# EAGLE board PCB v55 (EAGLE 9.7.0)
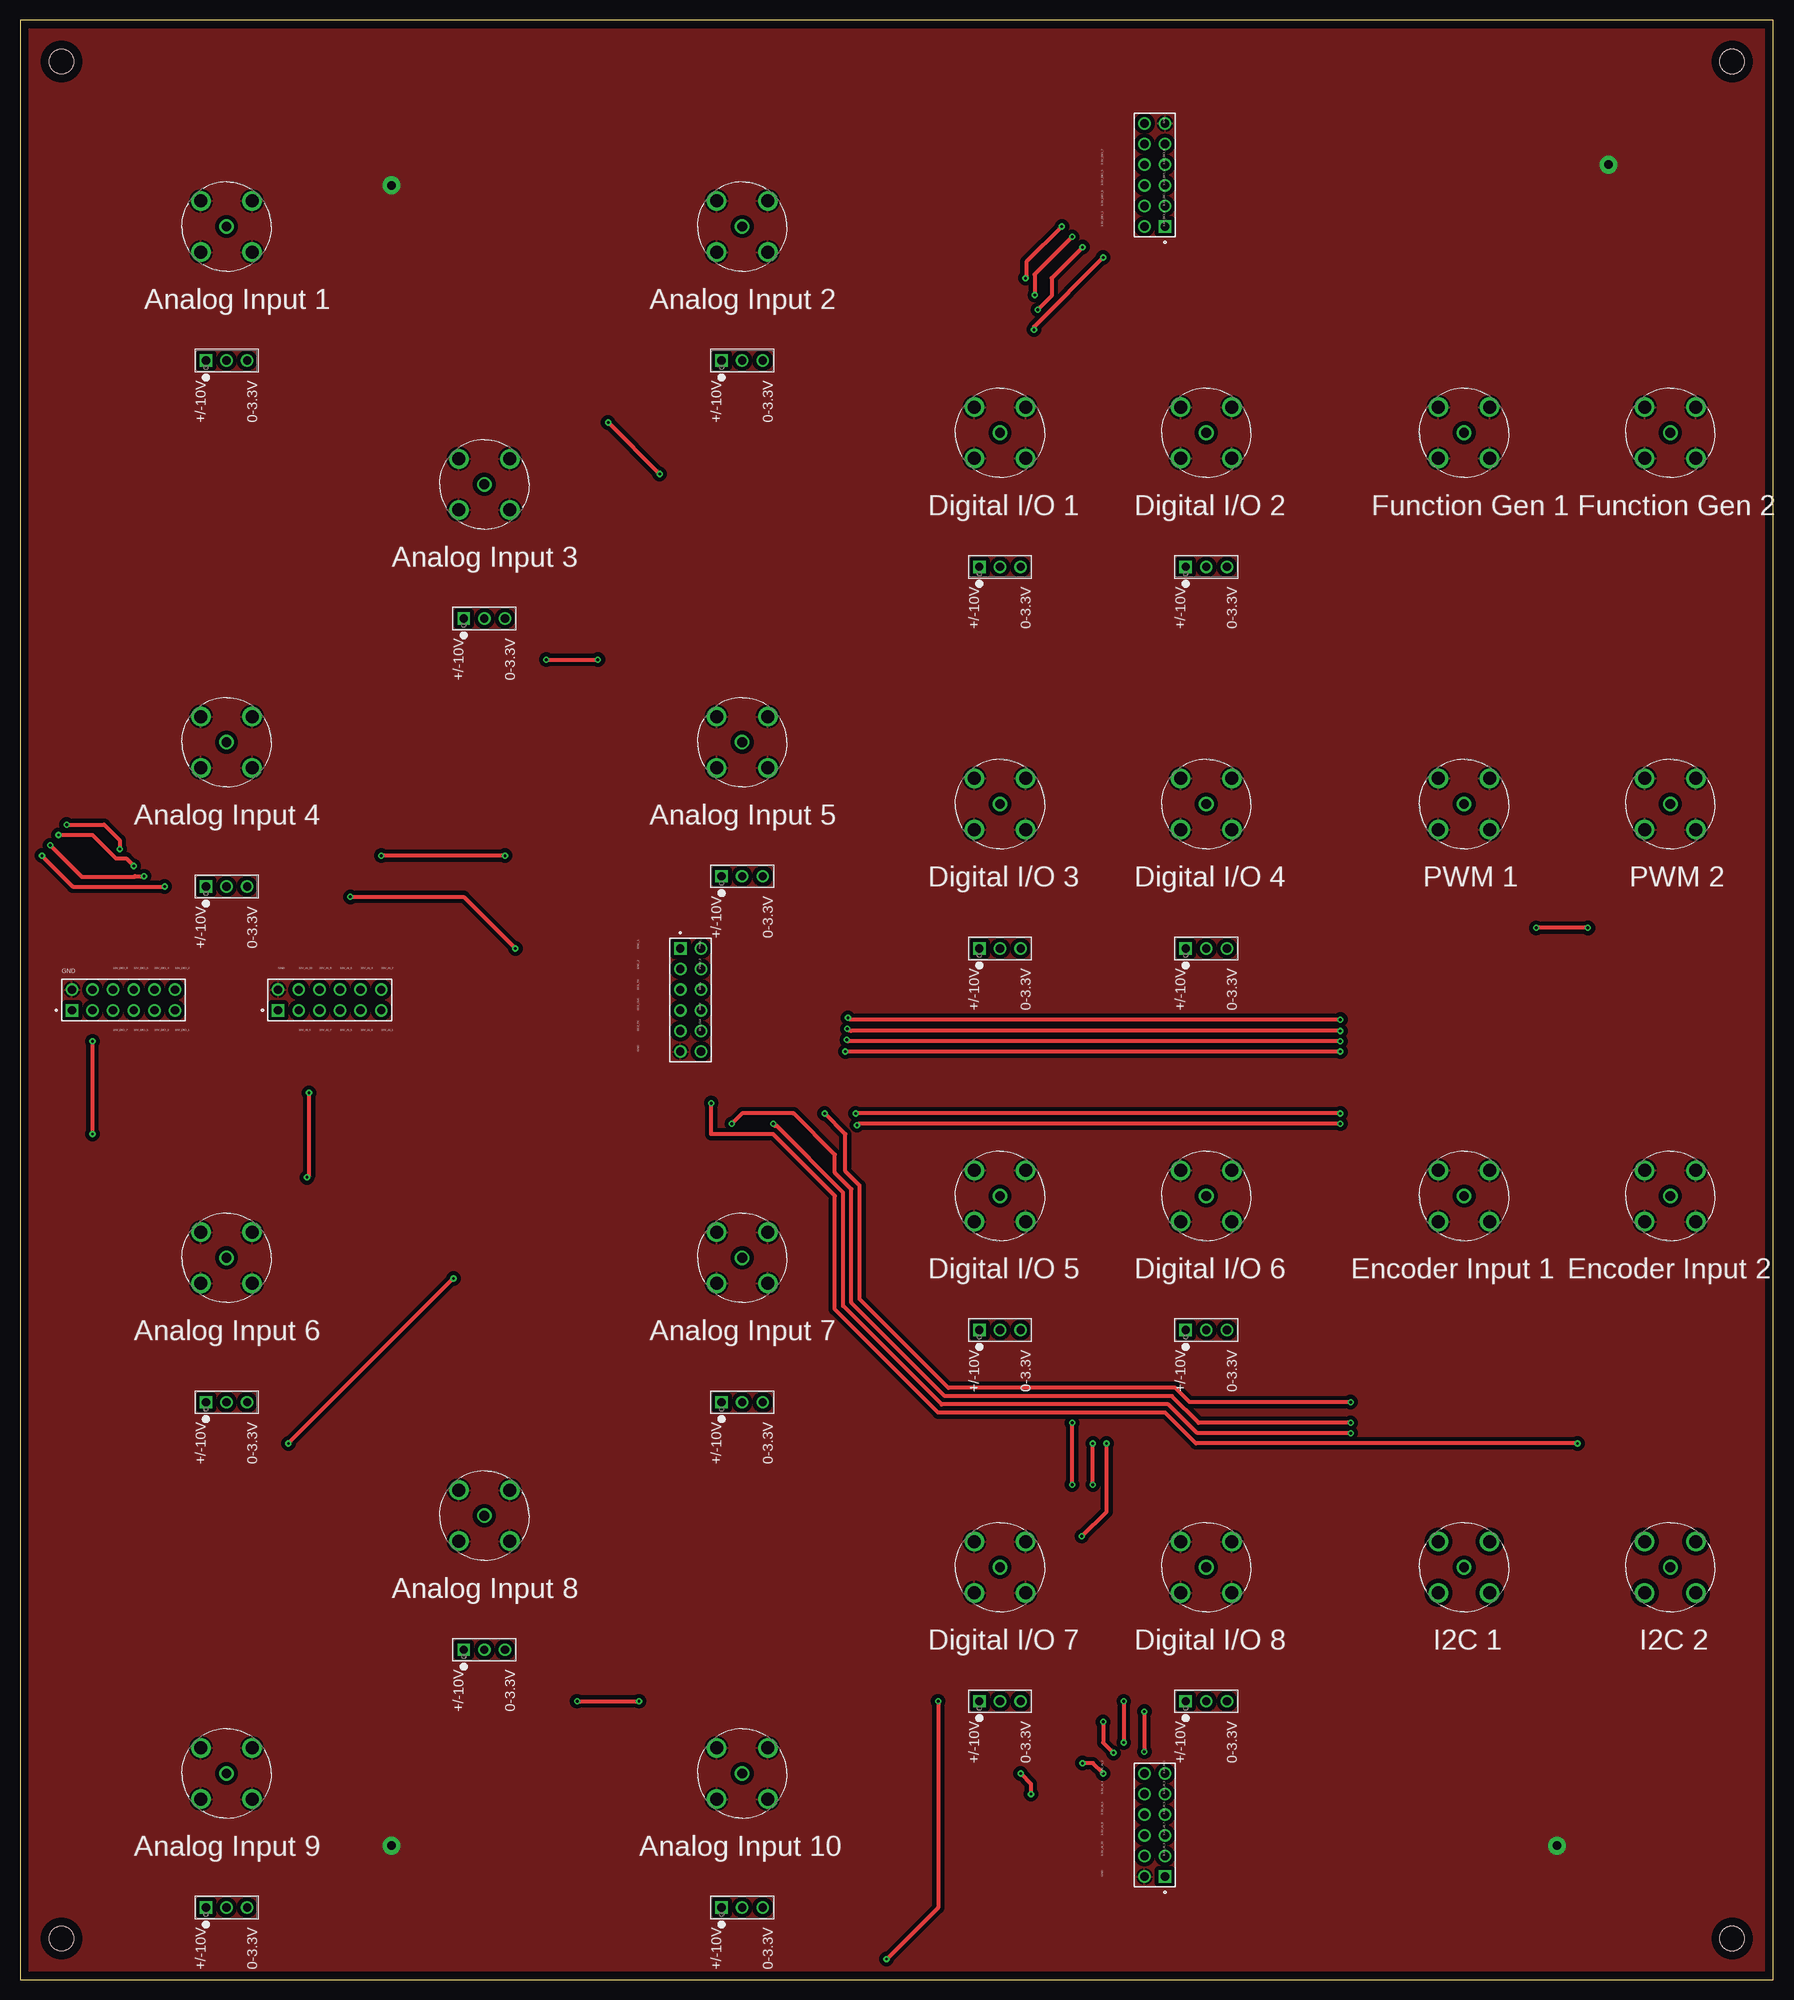
[diagram p0: board, top side]
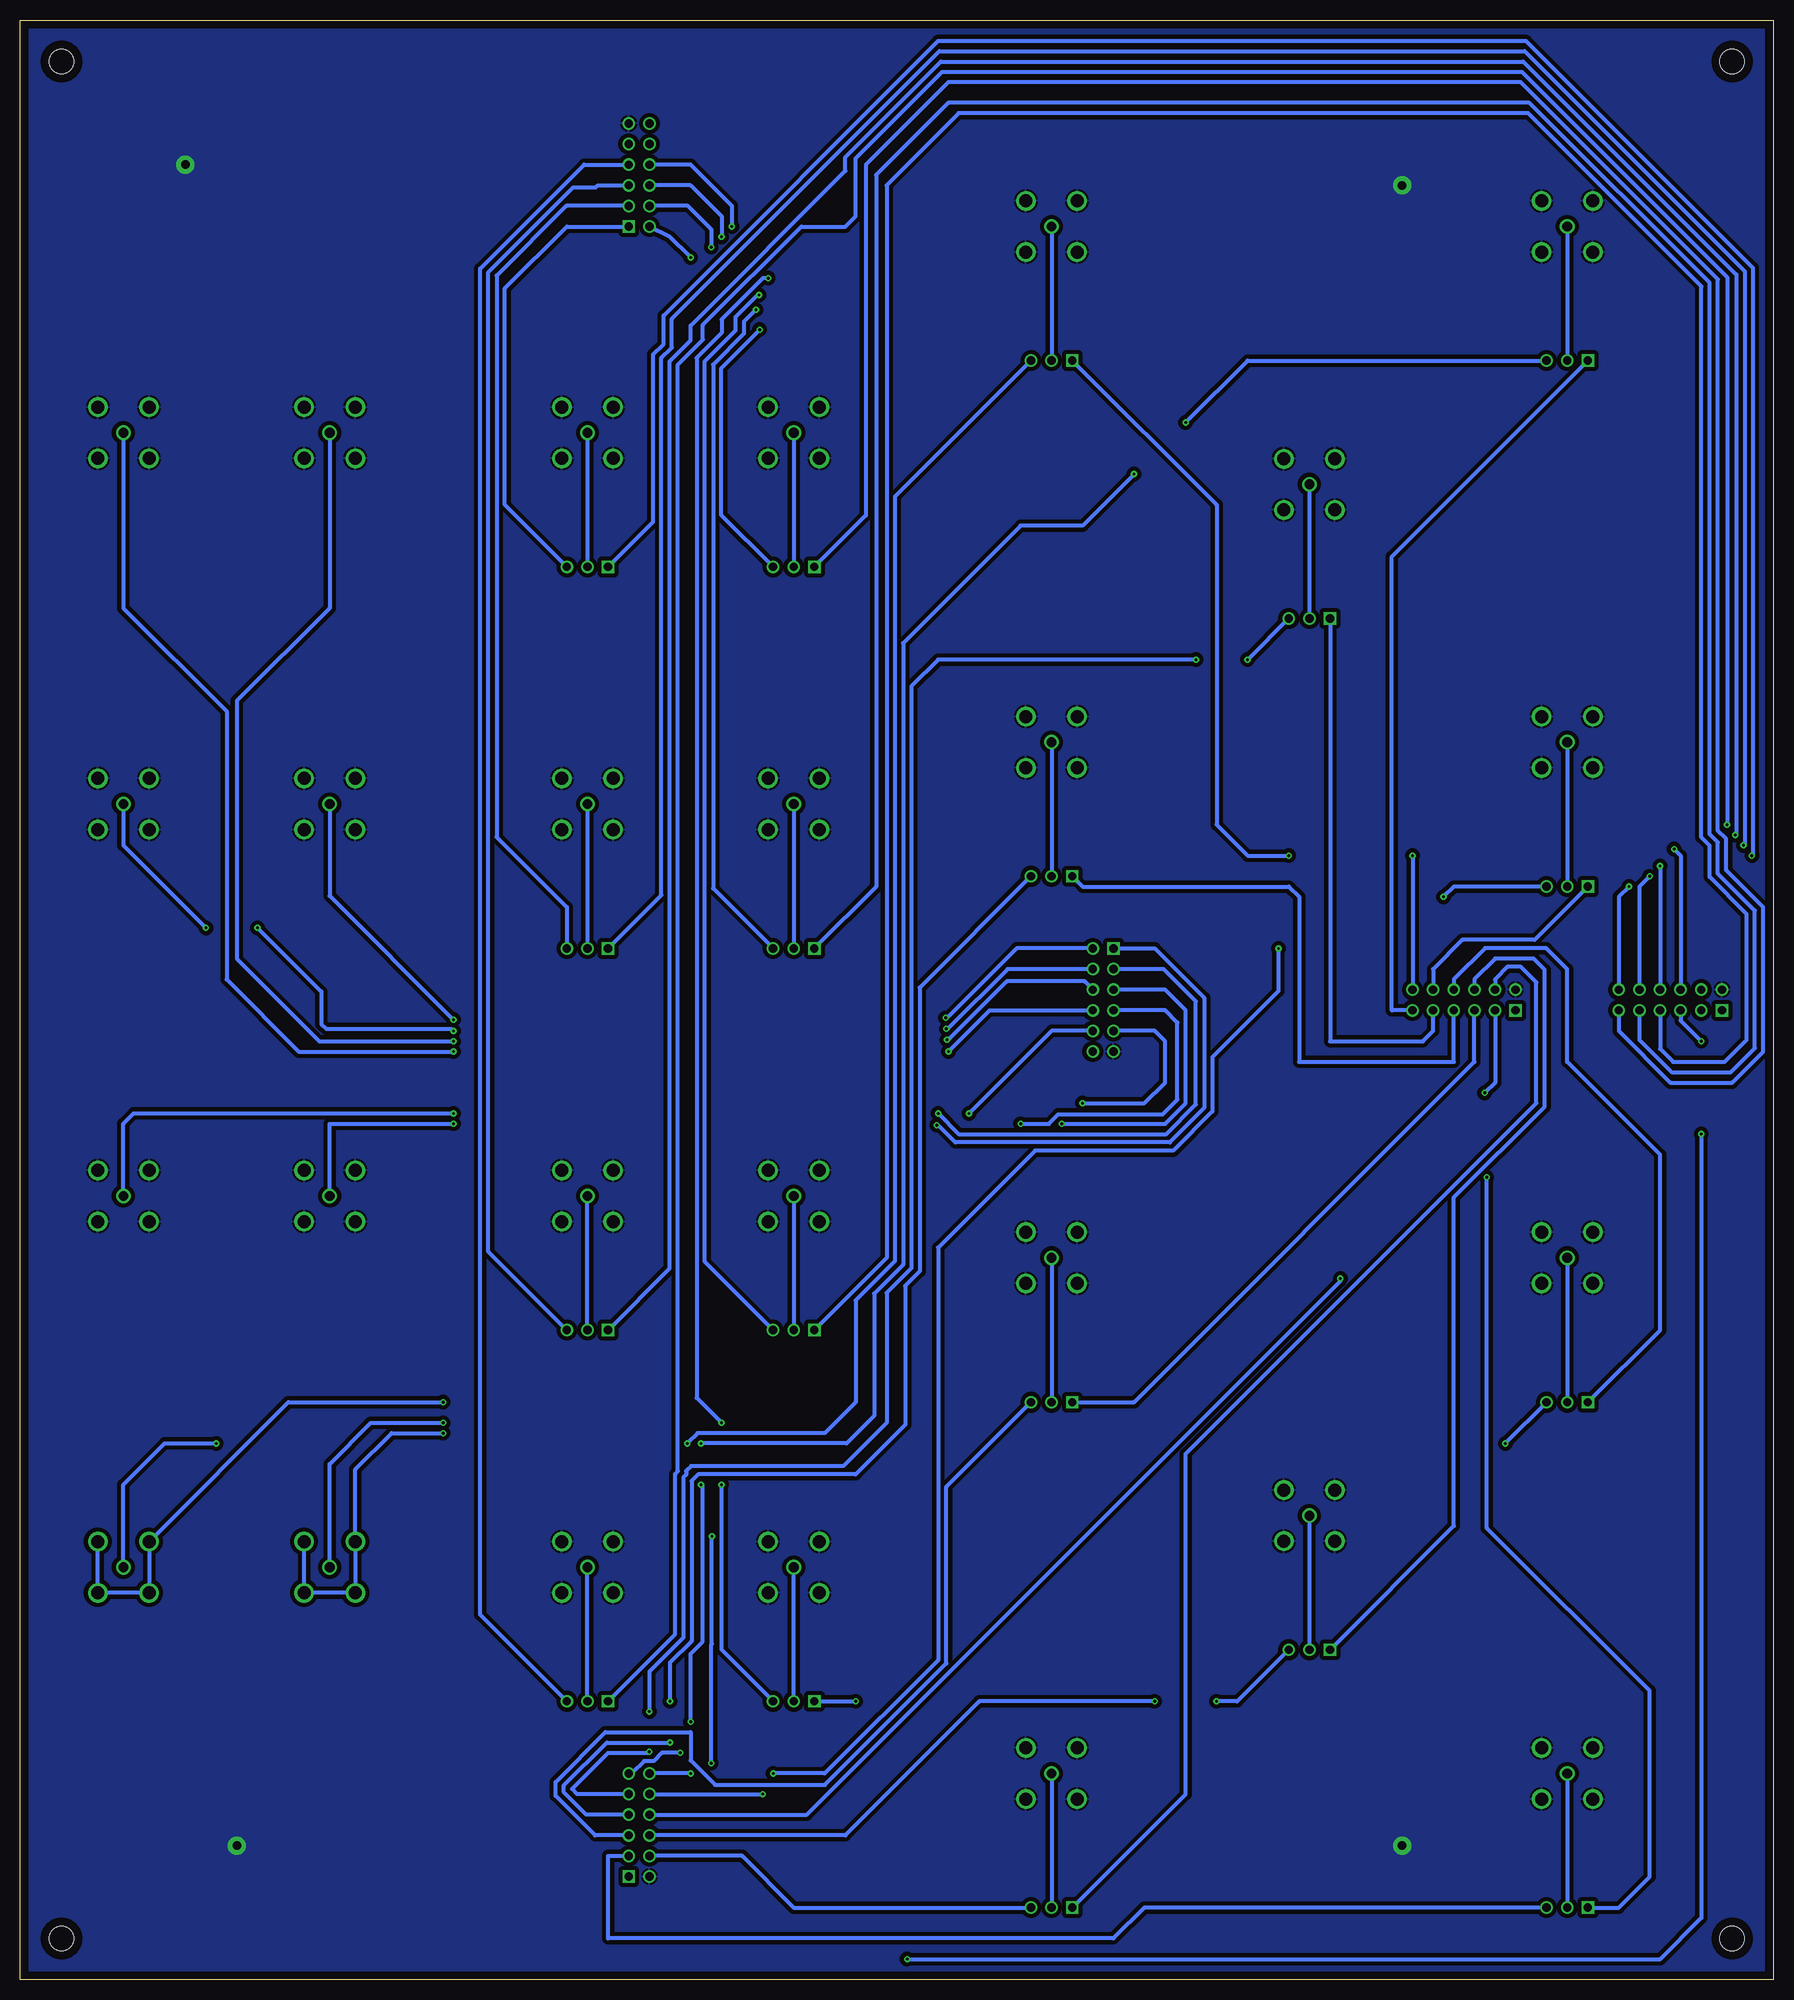
[diagram p1: board, bottom side, seen from below]

Size 215.9 x 241.3 mm. Coordinates in mm from the lower left corner, seen from the top.
Outline: 0,0 215.9,0 215.9,241.3 0,241.3 0,0
Copper layers (1*16): Top 0.035mm / dielectric 1.5mm / Bottom 0.035mm
Design rules "Fusion Electronics Design Rules": minimum track width 6mil, minimum drill 0.35mm, track to track 20mil, track to pad 20mil, pad to pad 20mil, via to via 20mil, smd to smd 20mil, copper to edge 40mil, drill to drill 20mil, minimum pad ring 10mil, minimum via ring 8mil, stop-mask expansion 4mil, vias tented up to drill 9999mil, thermal gap 10mil
Holes 3.05 mm at 5.08,236.22 5.08,5.08 210.82,5.08 210.82,236.22

## Footprints (pad centres in the part's own frame; a part is rotated, then mirrored left to right if it is on the bottom)
SAMTEC_DW-06-12-L-D-650 = drill 1.02 pad 1.37 square: 01 0,0 | drill 1.02 pad 1.37: 02 0,2.54; 03 2.54,0; 04 2.54,2.54; 05 5.08,0; 06 5.08,2.54; 07 7.62,0; 08 7.62,2.54; 09 10.16,0; 10 10.16,2.54; 11 12.7,0; 12 12.7,2.54
LINX_CONBNC001 = drill 1.2: 1 0,0 | drill 1.6: S1 3.15,3.15; S2 3.15,-3.15; S3 -3.15,-3.15; S4 -3.15,3.15
CONN_PH1-03-UA_ADM = drill 1.016 pad 1.524 square: 1 0,0 | drill 1.016 pad 1.524: 2 2.54,0; 3 5.08,0

## Placement (x,y rotation side)
J1  DW-06-12-L-D-650  [SAMTEC_DW-06-12-L-D-650]  6.35,119.38 0 top
J2  CONBNC001  [LINX_CONBNC001]  203.2,96.52 0 top
J3  CONBNC001  [LINX_CONBNC001]  203.2,144.78 0 top
J4  CONBNC001  [LINX_CONBNC001]  203.2,190.5 0 top
J5  CONBNC001  [LINX_CONBNC001]  25.4,152.4 0 top
J6  CONBNC001  [LINX_CONBNC001]  57.15,184.15 0 top
J7  CONBNC001  [LINX_CONBNC001]  25.4,215.9 0 top
J8  CONBNC001  [LINX_CONBNC001]  203.2,50.8 0 top
J9  CONBNC001  [LINX_CONBNC001]  25.4,25.4 0 top
J10  CONBNC001  [LINX_CONBNC001]  25.4,88.9 0 top
J11  CONBNC001  [LINX_CONBNC001]  88.9,215.9 0 top
J12  CONBNC001  [LINX_CONBNC001]  57.15,57.15 0 top
J13  CONBNC001  [LINX_CONBNC001]  88.9,25.4 0 top
J14  CONBNC001  [LINX_CONBNC001]  88.9,88.9 0 top
J15  CONBNC001  [LINX_CONBNC001]  88.9,152.4 0 top
J16  CONBNC001  [LINX_CONBNC001]  120.65,50.8 0 top
J17  CONBNC001  [LINX_CONBNC001]  120.65,96.52 0 top
J18  CONBNC001  [LINX_CONBNC001]  120.65,144.78 0 top
J19  CONBNC001  [LINX_CONBNC001]  120.65,190.5 0 top
J20  CONBNC001  [LINX_CONBNC001]  146.05,190.5 0 top
J21  CONBNC001  [LINX_CONBNC001]  146.05,144.78 0 top
J22  CONBNC001  [LINX_CONBNC001]  146.05,96.52 0 top
J23  CONBNC001  [LINX_CONBNC001]  146.05,50.8 0 top
J24  CONBNC001  [LINX_CONBNC001]  177.8,190.5 0 top
J25  CONBNC001  [LINX_CONBNC001]  177.8,144.78 0 top
J26  CONBNC001  [LINX_CONBNC001]  177.8,96.52 0 top
J27  CONBNC001  [LINX_CONBNC001]  177.8,50.8 0 top
J28  DW-06-12-L-D-650  [SAMTEC_DW-06-12-L-D-650]  31.75,119.38 0 top
J29  DW-06-12-L-D-650  [SAMTEC_DW-06-12-L-D-650]  81.28,127 270 top
J30  DW-06-12-L-D-650  [SAMTEC_DW-06-12-L-D-650]  140.97,215.9 90 top
J31  DW-06-12-L-D-650  [SAMTEC_DW-06-12-L-D-650]  140.97,12.7 90 top
J32  PH1-03-UA  [CONN_PH1-03-UA_ADM]  22.86,199.39 0 top
J33  PH1-03-UA  [CONN_PH1-03-UA_ADM]  54.61,167.64 0 top
J34  PH1-03-UA  [CONN_PH1-03-UA_ADM]  86.36,199.39 0 top
J35  PH1-03-UA  [CONN_PH1-03-UA_ADM]  22.86,134.62 0 top
J36  PH1-03-UA  [CONN_PH1-03-UA_ADM]  86.36,135.89 0 top
J37  PH1-03-UA  [CONN_PH1-03-UA_ADM]  22.86,71.12 0 top
J38  PH1-03-UA  [CONN_PH1-03-UA_ADM]  54.61,40.64 0 top
J39  PH1-03-UA  [CONN_PH1-03-UA_ADM]  22.86,8.89 0 top
J40  PH1-03-UA  [CONN_PH1-03-UA_ADM]  86.36,8.89 0 top
J41  PH1-03-UA  [CONN_PH1-03-UA_ADM]  118.11,173.99 0 top
J42  PH1-03-UA  [CONN_PH1-03-UA_ADM]  143.51,173.99 0 top
J45  PH1-03-UA  [CONN_PH1-03-UA_ADM]  118.11,127 0 top
J46  PH1-03-UA  [CONN_PH1-03-UA_ADM]  143.51,127 0 top
J49  PH1-03-UA  [CONN_PH1-03-UA_ADM]  118.11,80.01 0 top
J50  PH1-03-UA  [CONN_PH1-03-UA_ADM]  143.51,80.01 0 top
J53  PH1-03-UA  [CONN_PH1-03-UA_ADM]  118.11,34.29 0 top
J54  PH1-03-UA  [CONN_PH1-03-UA_ADM]  143.51,34.29 0 top
J56  PH1-03-UA  [CONN_PH1-03-UA_ADM]  86.36,71.12 0 top

## Library data of the parts
J1 J28-J31 = DW-06-12-L-D-650; MANUFACTURER: Samtec; PARTREV: R; STANDARD: Manufacturer Recommendations
J2-J27 = CONBNC001; AVAILABILITY: In Stock; CHECK_PRICES: https://www.snapeda.com/parts/CONBNC001/Linx/view-part/?ref=eda; DESCRIPTION: BNC Jack 50 Ohm PCB Through Hole; MF: Linx Technologies Inc.; MP: CONBNC001; PACKAGE: None; PRICE: None; PURCHASE-URL: https://www.snapeda.com/api/url_track_click_mouser/?unipart_id=12122496&manufacturer=Linx Technologies Inc.&part_name=CONBNC001&search_term=None; SNAPEDA_LINK: https://www.snapeda.com/parts/CONBNC001/Linx/view-part/?ref=snap
J32-J42 J45 J46 J49 J50 J53 J54 J56 = Pin Headers; COPYRIGHT: Copyright (C) 2025 Ultra Librarian. All rights reserved.; DIGIKEY_PART_NUMBER_1: 2057-PH1-03-UA-ND; MANUFACTURER_PART_NUMBER: PH1-03-UA; MFR_NAME: ADAM TECHNOLOGIES INC

## Nets
3.3V_AI_1: J31.11 J32.3
3.3V_AI_2: J31.12 J34.3
3.3V_AI_3: J31.09 J33.3
3.3V_AI_4: J31.10 J35.3
3.3V_AI_5: J31.07 J36.3
3.3V_AI_6: J31.08 J37.3
3.3V_AI_7: J31.05 J56.3
3.3V_AI_8: J31.06 J38.3
3.3V_AI_9: J31.03 J39.3
3.3V_AI_10: J31.04 J40.3
3.3V_DIO_1: J30.02 J41.3
3.3V_DIO_2: J30.01 J42.3
3.3V_DIO_3: J30.04 J45.3
3.3V_DIO_4: J30.03 J46.3
3.3V_DIO_5: J30.06 J49.3
3.3V_DIO_6: J30.05 J50.3
3.3V_DIO_7: J30.08 J53.3
3.3V_DIO_8: J30.07 J54.3
10V_AI_1: J28.11 J32.1
10V_AI_2: J28.12 J34.1
10V_AI_3: J28.09 J33.1
10V_AI_4: J28.10 J35.1
10V_AI_5: J28.07 J36.1
10V_AI_6: J28.08 J37.1
10V_AI_7: J28.05 J56.1
10V_AI_8: J28.06 J38.1
10V_AI_9: J28.03 J39.1
10V_AI_10: J28.04 J40.1
10V_DIO_1: J1.11 J41.1
10V_DIO_2: J1.12 J42.1
10V_DIO_3: J1.09 J45.1
10V_DIO_4: J1.10 J46.1
10V_DIO_5: J1.07 J49.1
10V_DIO_6: J1.08 J50.1
10V_DIO_7: J1.05 J53.1
10V_DIO_8: J1.06 J54.1
AI1: J7.1 J32.2
AI2: J11.1 J34.2
AI3: J6.1 J33.2
AI4: J5.1 J35.2
AI5: J15.1 J36.2
AI6: J10.1 J37.2
AI7: J14.1 J56.2
AI8: J12.1 J38.2
AI9: J9.1 J39.2
AI10: J13.1 J40.2
DAC1: J24.1 J29.06
DAC2: J4.1 J29.08
DIO1: J19.1 J41.2
DIO2: J20.1 J42.2
DIO3: J18.1 J45.2
DIO4: J21.1 J46.2
DIO5: J17.1 J49.2
DIO6: J22.1 J50.2
DIO7: J16.1 J53.2
DIO8: J23.1 J54.2
ENC1: J26.1 J29.01
ENC2: J2.1 J29.03
GND: J1.02 J2.S1 J2.S2 J2.S3 J2.S4 J3.S1 J3.S2 J3.S3 J3.S4 J4.S1 J4.S2 J4.S3 J4.S4 J5.S1 J5.S2 J5.S3 J5.S4 J6.S1 J6.S2 J6.S3 J6.S4 J7.S1 J7.S2 J7.S3 J7.S4 J9.S1 J9.S2 J9.S3 J9.S4 J10.S1 J10.S2 J10.S3 J10.S4 J11.S1 J11.S2 J11.S3 J11.S4 J12.S1 J12.S2 J12.S3 J12.S4 J13.S1 J13.S2 J13.S3 J13.S4 J14.S1 J14.S2 J14.S3 J14.S4 J15.S1 J15.S2 J15.S3 J15.S4 J16.S1 J16.S2 J16.S3 J16.S4 J17.S1 J17.S2 J17.S3 J17.S4 J18.S1 J18.S2 J18.S3 J18.S4 J19.S1 J19.S2 J19.S3 J19.S4 J20.S1 J20.S2 J20.S3 J20.S4 J21.S1 J21.S2 J21.S3 J21.S4 J22.S1 J22.S2 J22.S3 J22.S4 J23.S1 J23.S2 J23.S3 J23.S4 J24.S1 J24.S2 J24.S3 J24.S4 J25.S1 J25.S2 J25.S3 J25.S4 J26.S1 J26.S2 J26.S3 J26.S4 J28.02 J29.11 J30.11 J31.02
I2C1_CLK: J27.S1 J27.S2 J27.S3 J27.S4 J29.07
I2C1_TX: J27.1 J29.05
I2C2_CLK: J8.S1 J8.S2 J8.S3 J8.S4 J29.10
I2C2_TX: J8.1 J29.09
N$15: J1.04
N$20: J28.01
N$43: J29.12
N$48: J30.09
N$54: J30.10
N$55: J30.12
N$56: J31.01
PWM_1: J25.1 J29.02
PWM_2: J3.1 J29.04

## Tracks (layer width: path | path; a pad name or v marks a point on that pad's centre or on a via)
3.3V_AI_1  (via drill 0.35)
  Top 0.508: v72.39,191.77 v78.74,185.42 | v132.08,60.96 v132.08,66.04 | v133.35,31.75 133.35,29.21 v134.62,27.94
  Bottom 0.508: J32.3 64.77,199.39 v72.39,191.77 | v78.74,185.42 85.09,179.07 92.71,179.07 107.19,164.59 107.19,88.06 110.74,84.5 110.74,69.43 114.13,66.04 v132.08,66.04 | v133.35,31.75 133.35,40.14 131.86,41.63 131.86,60.74 v132.08,60.96 | v134.62,27.94 136.9,27.94 137.92,26.93 139.06,26.93 140.59,25.4 J31.11
3.3V_AI_2  (via drill 0.35)
  Top 0.508: v133.35,25.4 132.08,26.67 v130.81,26.67 | v133.77,66.04 133.77,57.66 v130.72,54.61
  Bottom 0.508: v133.35,25.4 J31.12 | J34.3 108.2,182.63 108.2,88.48 113.03,83.65 113.03,71.12 116.84,67.31 132.5,67.31 v133.77,66.04 | v130.81,26.67 130.81,41.24 130.72,41.34 v130.72,54.61
3.3V_AI_3  (via drill 0.35)
  Top 0.508: v64.77,162.56 v71.12,162.56 | v138.43,33.02 v138.43,28.07
  Bottom 0.508: J33.3 v64.77,162.56 | v71.12,162.56 102.87,162.56 106.17,159.26 106.17,87.64 109.22,84.59 109.22,68.58 114.55,63.25 133.29,63.25 133.89,62.65 133.89,62.2 134.24,61.85 134.24,42.13 138.43,37.93 v138.43,33.02 | J31.09 147.32,22.86 147.96,23.5 143.51,27.94 138.55,27.94 v138.43,28.07
3.3V_AI_4  (via drill 0.35)
  Top 0.508: v40.64,133.35 54.61,133.35 v60.96,127 | v123.19,25.4 124.46,24.13 v124.46,22.86
  Bottom 0.508: J35.3 39.37,134.62 v40.64,133.35 | v60.96,127 60.96,121.75 69.09,113.62 69.09,106.94 73.92,102.11 90.93,102.11 102.87,90.17 102.87,39.37 116.84,25.4 v123.19,25.4 | J31.10 v124.46,22.86
3.3V_AI_5  (via drill 0.35)
  Top 0.508: v135.89,34.29 v135.89,29.21
  Bottom 0.508: J36.3 105.16,122.17 105.16,87.22 106.93,85.44 106.93,68.33 113.03,62.23 132.42,62.23 133.22,61.43 133.22,41.71 135.89,39.04 v135.89,34.29 | v135.89,29.21 143.68,29.21 148.97,23.92 148.97,23.07 146.22,20.32 J31.07
3.3V_AI_6  (via drill 0.35)
  Top 0.508: v33.02,66.04 v53.34,86.36
  Bottom 0.508: J37.3 v33.02,66.04 | J31.08 119.05,20.32 53.34,86.03 v53.34,86.36
3.3V_AI_7
  Bottom 0.508: J56.3 101.85,60.71 101.85,38.95 116.8,24 130.34,24 133.35,27.01 133.35,30.48 143.84,30.48 149.99,24.34 149.99,22.65 145.11,17.78 J31.05
3.3V_AI_8  (via drill 0.35)
  Top 0.508: v68.58,34.29 v76.2,34.29
  Bottom 0.508: J38.3 66.04,34.29 v68.58,34.29 | v76.2,34.29 97.79,34.29 114.3,17.78 J31.06
3.3V_AI_9
  Bottom 0.508: J39.3 77.47,8.89 81.28,5.08 143.51,5.08 143.51,15.24 J31.03
3.3V_AI_10
  Bottom 0.508: J40.3 120.65,8.89 127,15.24 J31.04
3.3V_DIO_1  (via drill 0.35)
  Top 0.508: v133.35,212.09 124.84,203.58 v124.84,203.2
  Bottom 0.508: v133.35,212.09 135.89,214.63 J30.02 | J41.3 129.57,180.37 129.57,198.47 v124.84,203.2
3.3V_DIO_2
  Bottom 0.508: J42.3 156.21,181.61 156.21,208.28 148.59,215.9 J30.01
3.3V_DIO_3  (via drill 0.35)
  Top 0.508: v130.81,213.36 127,209.55 127,207.35 v125.3,205.66
  Bottom 0.508: v130.81,213.36 130.81,215.57 133.68,218.44 J30.04 | J45.3 130.59,134.4 130.59,198.89 126.78,202.7 126.78,204.18 v125.3,205.66
3.3V_DIO_4
  Bottom 0.508: J46.3 148.59,132.08 157.23,140.72 157.23,209.87 148.66,218.44 J30.03
3.3V_DIO_5  (via drill 0.35)
  Top 0.508: v129.54,214.63 124.92,210.01 v124.92,207.47
  Bottom 0.508: J30.06 133.35,220.98 129.54,217.17 v129.54,214.63 | J49.3 131.6,88.42 131.6,199.31 127.79,203.12 127.79,204.78 125.1,207.47 v124.92,207.47
3.3V_DIO_6
  Bottom 0.508: J30.05 144.78,220.98 145.03,220.73 147.81,220.73 158.24,210.29 158.24,89.66 J50.3
3.3V_DIO_7  (via drill 0.35)
  Top 0.508: v129.54,60.96 v129.54,68.58 | v123.78,209.55 123.91,209.67 123.91,211.54 v128.27,215.9
  Bottom 0.508: J53.3 129.54,40.64 v129.54,60.96 | v128.27,215.9 128.27,218.44 133.35,223.52 J30.08 | v123.78,209.55 124.46,209.55 129.54,204.47 129.54,202.81 132.62,199.73 132.62,71.66 v129.54,68.58
3.3V_DIO_8
  Bottom 0.508: J54.3 159.26,44.96 159.26,210.71 146.45,223.52 J30.07
10V_AI_1
  Bottom 0.508: J32.1 46.99,175.26 46.99,119.38 J28.11
10V_AI_2  (via drill 0.35)
  Top 0.508: v59.69,138.43 v44.45,138.43
  Bottom 0.508: J34.1 68.58,181.61 68.58,142.24 64.77,138.43 v59.69,138.43 | v44.45,138.43 J28.12
10V_AI_3
  Bottom 0.508: J33.1 54.61,115.57 43.18,115.57 41.91,116.84 J28.09
10V_AI_4
  Bottom 0.508: J28.10 41.91,124.46 38.3,128.07 29.41,128.07 J35.1
10V_AI_5
  Bottom 0.508: J36.1 85.09,134.62 59.69,134.62 58.42,133.35 58.42,113.03 39.37,113.03 J28.07
10V_AI_6
  Bottom 0.508: J37.1 13.97,80.01 13.97,101.6 25.4,113.03 25.4,124.46 27.99,127.05 35.51,127.05 39.37,123.19 J28.08
10V_AI_7
  Bottom 0.508: J56.1 78.74,71.12 36.83,113.03 J28.05
10V_AI_8
  Bottom 0.508: J38.1 39.37,55.88 39.37,96.35 28.19,107.53 28.19,124.38 29.55,125.73 34.29,125.73 36.83,123.19 J28.06
10V_AI_9  (via drill 0.35)
  Top 0.508: v35.56,109.22 35.56,99.06 v35.3,98.81
  Bottom 0.508: J39.1 19.05,8.89 15.24,12.7 15.24,35.56 35.3,55.62 v35.3,98.81 | v35.56,109.22 34.29,110.49 J28.03
10V_AI_10
  Bottom 0.508: J40.1 72.39,22.86 72.39,64.77 29.21,107.95 29.21,122.81 31.12,124.72 32.76,124.72 34.29,123.19 J28.04
10V_DIO_1
  Bottom 0.508: J41.1 111.76,180.34 111.76,223.52 101.6,233.68 31.15,233.68 6.85,209.38 6.85,141.51 5.84,140.5 5.84,136.65 1.27,132.08 1.27,114.3 5.08,110.49 12.7,110.49 19.05,116.84 J1.11
10V_DIO_2  (via drill 0.35)
  Top 0.508: v2.66,138.43 6.47,134.62 v17.78,134.62
  Bottom 0.508: v2.66,138.43 2.54,138.55 2.54,210.82 30.48,238.76 102.87,238.76 136.68,204.95 136.68,201.42 137.95,200.15 137.95,179.55 J42.1 | v17.78,134.62 19.05,133.35 J1.12
10V_DIO_3
  Bottom 0.508: J45.1 110.49,134.62 110.49,222.25 101.6,231.14 30.04,231.14 7.87,208.96 7.87,141.09 6.85,140.08 6.85,136.23 2.29,131.66 2.29,114.72 5.25,111.76 12.53,111.76 16.51,115.74 J1.09
10V_DIO_4  (via drill 0.35)
  Top 0.508: v15.24,135.89 14.14,135.89 14.06,135.81 7.57,135.81 v3.68,139.7
  Bottom 0.508: v15.24,135.89 16.51,134.62 J1.10 | J46.1 136.94,133.57 136.94,199.73 135.67,201 135.67,204.53 102.7,237.49 30.65,237.49 3.56,210.4 3.56,139.82 v3.68,139.7
10V_DIO_5
  Bottom 0.508: J49.1 109.22,88.9 109.22,220.98 100.33,229.87 30.21,229.87 8.88,208.54 8.88,140.67 7.87,139.66 7.87,135.81 3.3,131.24 3.3,115.74 6.01,113.03 12.37,113.03 13.97,114.63 J1.07
10V_DIO_6  (via drill 0.35)
  Top 0.508: v13.97,137.16 13.03,138.1 11.76,138.1 8.89,140.97 v4.7,140.97
  Bottom 0.508: v13.97,137.16 J1.08 | J50.1 135.92,87.6 135.92,199.31 133.35,201.88 133.35,203.71 114.3,222.76 114.3,224.46 102.54,236.22 30.81,236.22 4.57,209.98 4.57,141.09 v4.7,140.97
10V_DIO_7  (via drill 0.35)
  Top 0.508: v113.03,34.29 113.03,8.89 v106.68,2.54 | v8.89,115.57 v8.89,104.14
  Bottom 0.508: J53.1 v113.03,34.29 | v106.68,2.54 13.97,2.54 8.89,7.62 v8.89,104.14 | J1.05 11.43,118.11 v8.89,115.57
10V_DIO_8  (via drill 0.35)
  Top 0.508: v12.24,139.24 12.24,140.33 10.33,142.24 v5.71,142.24
  Bottom 0.508: J1.06 11.43,138.43 v12.24,139.24 | J54.1 135.25,42.55 135.25,62.27 134.91,62.62 134.91,198.88 131.83,201.97 131.83,203.8 119.72,215.9 114.3,215.9 113.03,217.17 113.03,224.29 102.37,234.95 30.98,234.95 5.71,209.68 v5.71,142.24
AI1
  Bottom 0.508: J7.1 J32.2
AI2
  Bottom 0.508: J11.1 J34.2
AI3
  Bottom 0.508: J6.1 J33.2
AI4
  Bottom 0.508: J5.1 J35.2
AI5
  Bottom 0.508: J15.1 J36.2
AI6
  Bottom 0.508: J10.1 J37.2
AI7
  Bottom 0.508: J14.1 J56.2
AI8
  Bottom 0.508: J12.1 J38.2
AI9
  Bottom 0.508: J9.1 J39.2
AI10
  Bottom 0.508: J13.1 J40.2
DAC1  (via drill 0.35)
  Top 0.508: v162.56,115.57 101.94,115.57 v101.77,115.74
  Bottom 0.508: J24.1 177.8,168.91 189.23,157.48 189.23,125.73 179.07,115.57 v162.56,115.57 | v101.77,115.74 101.6,115.74 94.4,122.94 84.84,122.94 J29.06
DAC2  (via drill 0.35)
  Top 0.508: v162.56,114.3 v101.6,114.3
  Bottom 0.508: J4.1 203.2,168.91 190.5,156.21 190.5,123.19 181.61,114.3 v162.56,114.3 | v101.6,114.3 96.52,119.38 J29.08
DIO1
  Bottom 0.508: J19.1 J41.2
DIO2
  Bottom 0.508: J20.1 J42.2
DIO3
  Bottom 0.508: J18.1 J45.2
DIO4
  Bottom 0.508: J21.1 J46.2
DIO5
  Bottom 0.508: J17.1 J49.2
DIO6
  Bottom 0.508: J50.2 J22.1
DIO7
  Bottom 0.508: J53.2 J16.1
DIO8
  Bottom 0.508: J54.2 J23.1
ENC1  (via drill 0.35)
  Top 0.508: v162.56,105.41 103.21,105.41 v103.04,105.24
  Bottom 0.508: J26.1 177.8,105.41 v162.56,105.41 | J29.01 76.2,127 70.1,120.9 70.1,107.36 74.34,103.12 100.75,103.12 102.87,105.24 v103.04,105.24
ENC2  (via drill 0.35)
  Top 0.508: v162.56,106.68 v102.87,106.68
  Bottom 0.508: J2.1 203.2,105.41 201.93,106.68 v162.56,106.68 | v102.87,106.68 100.33,104.14 74.76,104.14 71.12,107.78 71.12,120.48 75.1,124.46 J29.03
GND  (via drill 1.05 pad 2.18)
  other vias: 195.58,223.52 45.72,220.98 189.23,16.51 45.72,16.51
  pour Bottom: -27.86,-27.86 242.54,-27.86 247.57,-22.83 247.57,257.78 243.81,261.54 -27.86,261.54
  pour Top: -25.44,-16.45 -25.42,-16.43 217.14,-16.43 228.52,-5.05 228.52,246.35 226.03,248.84 -10.13,248.84 -27.86,231.11 -27.86,-18.87
I2C1_CLK  (via drill 0.35)
  Top 0.508: v163.83,67.31 144.95,67.31 141.39,70.87 113.45,70.87 101.35,82.97 101.35,96.94 93.13,105.16 92.96,105.16 v92.71,105.41
  Bottom 0.508: v163.83,67.31 170.18,67.31 174.65,62.84 J27.S4 J27.S3 J27.S2 J27.S1 | J29.07 74.93,119.38 73.41,117.86 73.41,108.37 75.23,106.55 88.1,106.55 89.24,105.41 v92.71,105.41
I2C1_TX  (via drill 0.35)
  Top 0.508: v87.63,105.41 88.9,106.68 95.25,106.68 100.33,101.6 100.33,99.39 102.36,97.36 102.36,83.39 113.87,71.88 141.81,71.88 145.11,68.58 v163.83,68.58
  Bottom 0.508: J27.1 177.8,63.5 172.72,68.58 v163.83,68.58 | v87.63,105.41 74.93,105.41 72.39,107.95 72.39,119.38 74.93,121.92 J29.05
I2C2_CLK  (via drill 0.35)
  Top 0.508: v99.06,106.68 101.6,104.14 101.6,99.56 103.38,97.78 103.38,83.81 114.29,72.9 142.23,72.9 144.01,71.12 v163.83,71.12
  Bottom 0.508: v163.83,71.12 182.88,71.12 J8.S4 J8.S3 J8.S2 J8.S1 | v99.06,106.68 88.9,116.84 J29.10
I2C2_TX  (via drill 0.35)
  Top 0.508: v191.77,66.04 144.78,66.04 140.97,69.85 113.03,69.85 100.33,82.55 100.33,96.52 92.71,104.14 85.09,104.14 v85.09,107.95
  Bottom 0.508: J8.1 203.2,60.96 198.12,66.04 v191.77,66.04 | v85.09,107.95 77.47,107.95 74.93,110.49 74.93,115.57 76.2,116.84 J29.09
PWM_1  (via drill 0.35)
  Top 0.508: v162.56,118.23 102.33,118.23 102.15,118.23 v101.94,118.45
  Bottom 0.508: J25.1 177.8,133.47 v162.56,118.23 | v101.94,118.45 101.76,118.45 93.21,127 J29.02
PWM_2  (via drill 0.35)
  Top 0.508: v193.04,129.54 v186.69,129.54 | v162.56,116.84 102.28,116.84 102.24,116.88 102.07,116.88 v101.86,117.09
  Bottom 0.508: J3.1 203.2,139.7 v193.04,129.54 | v186.69,129.54 178.82,121.67 178.82,117.69 178.22,117.09 163.83,117.09 163.41,117.09 162.81,117.09 v162.56,116.84 | v101.86,117.09 101.68,117.09 94.31,124.46 J29.04

## Text on the board
tPlace: GND | 3.3V_DIO_7 | 3.3V_DIO_8 | 3.3V_DIO_5 | 3.3V_DIO_6 | 3.3V_DIO_3 | 3.3V_DIO_4 | 3.3V_DIO_1 | 3.3V_DIO_2 | Analog Input 1 | Analog Input 2 | +/-10V | 0-3.3V | +/-10V | 0-3.3V | Digital I/O 1 | Digital I/O 2 | Function Gen 1 | Function Gen 2 | Analog Input 3 | +/-10V | 0-3.3V | +/-10V | 0-3.3V | +/-10V | 0-3.3V | Analog Input 4 | Analog Input 5 | Digital I/O 3 | Digital I/O 4 | PWM 1 | PWM 2 | +/-10V | 0-3.3V | +/-10V | 0-3.3V | ENC_1 | PWM_1 | 10V_DIO_8 | 10V_DIO_6 | 10V_DIO_4 | 10V_DIO_2 | GND | 10V_AI_10 | 10V_AI_8 | 10V_AI_6 | 10V_AI_4 | 10V_AI_2 | ENC_2 | PWM_2 | GND | I2C1_TX | DAC1 | I2C1_CLK | DAC2 | +/-10V | 0-3.3V | +/-10V | 0-3.3V | 10V_DIO_7 | 10V_DIO_5 | 10V_DIO_3 | 10V_DIO_1 | 10V_AI_9 | 10V_AI_7 | 10V_AI_5 | 10V_AI_3 | 10V_AI_1 | I2C2_TX | I2C2_CLK | GND | Digital I/O 5 | Digital I/O 6 | Encoder Input 1 | Encoder Input 2 | Analog Input 6 | Analog Input 7 | +/-10V | 0-3.3V | +/-10V | 0-3.3V | +/-10V | 0-3.3V | +/-10V | 0-3.3V | Analog Input 8 | Digital I/O 7 | Digital I/O 8 | I2C 1 | I2C 2 | +/-10V | 0-3.3V | +/-10V | 0-3.3V | +/-10V | 0-3.3V | 3.3V_AI_2 | 3.3V_AI_1 | 3.3V_AI_4 | 3.3V_AI_3 | 3.3V_AI_6 | 3.3V_AI_5 | 3.3V_AI_8 | 3.3V_AI_7 | Analog Input 9 | Analog Input 10 | 3.3V_AI_10 | 3.3V_AI_9 | GND | +/-10V | 0-3.3V | +/-10V | 0-3.3V